# EAGLE board D_amplifier (EAGLE 9.6.2)
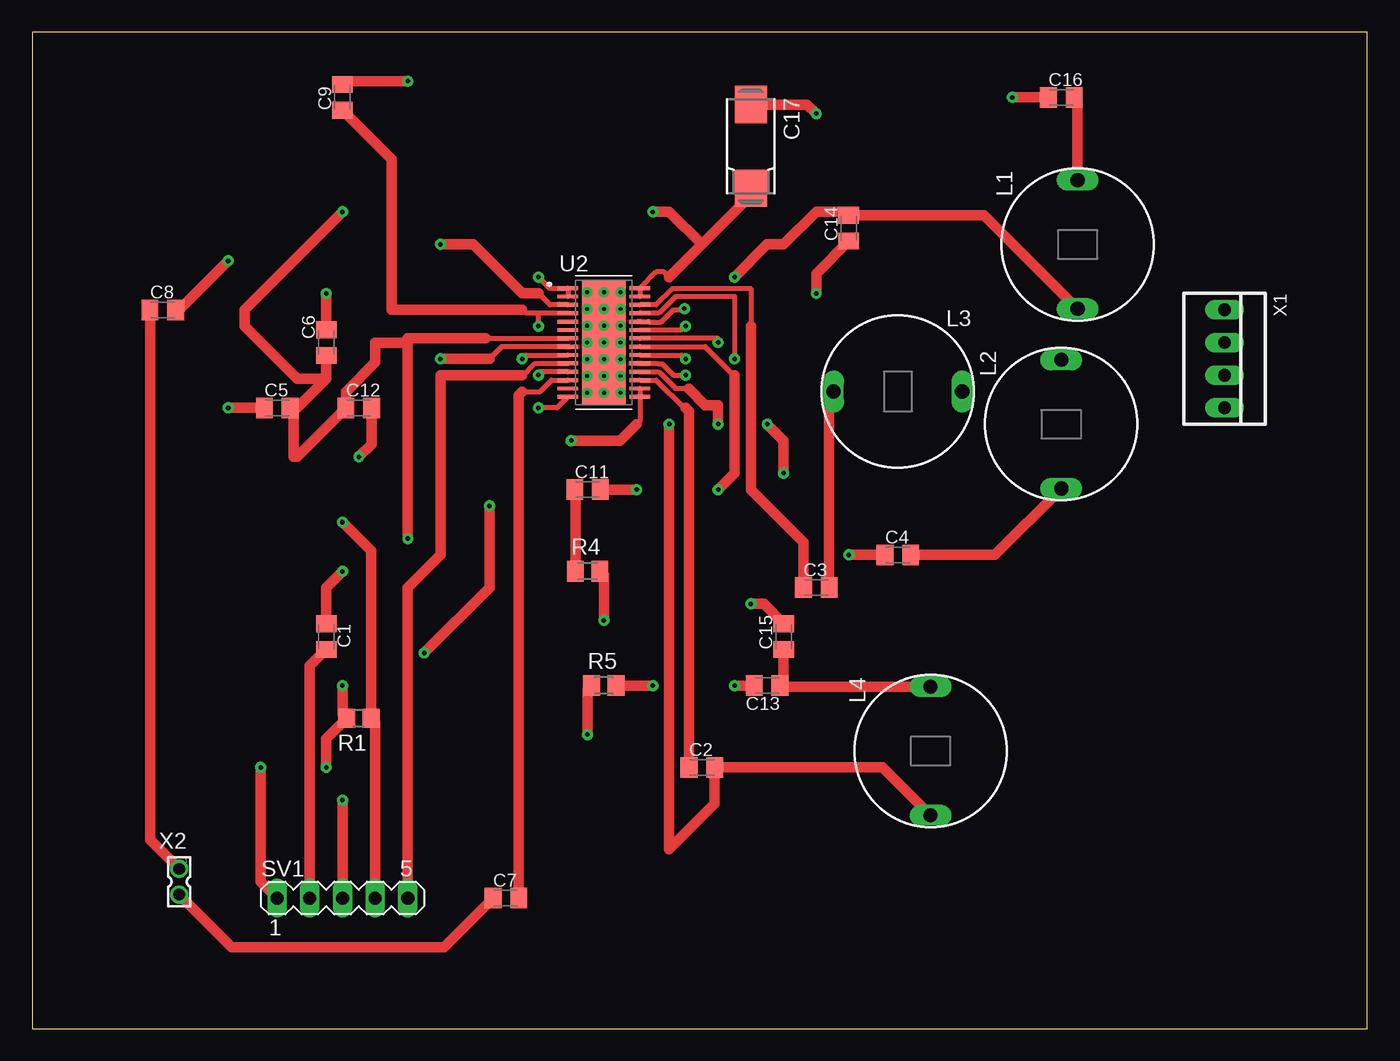
[diagram p0: board, top side]
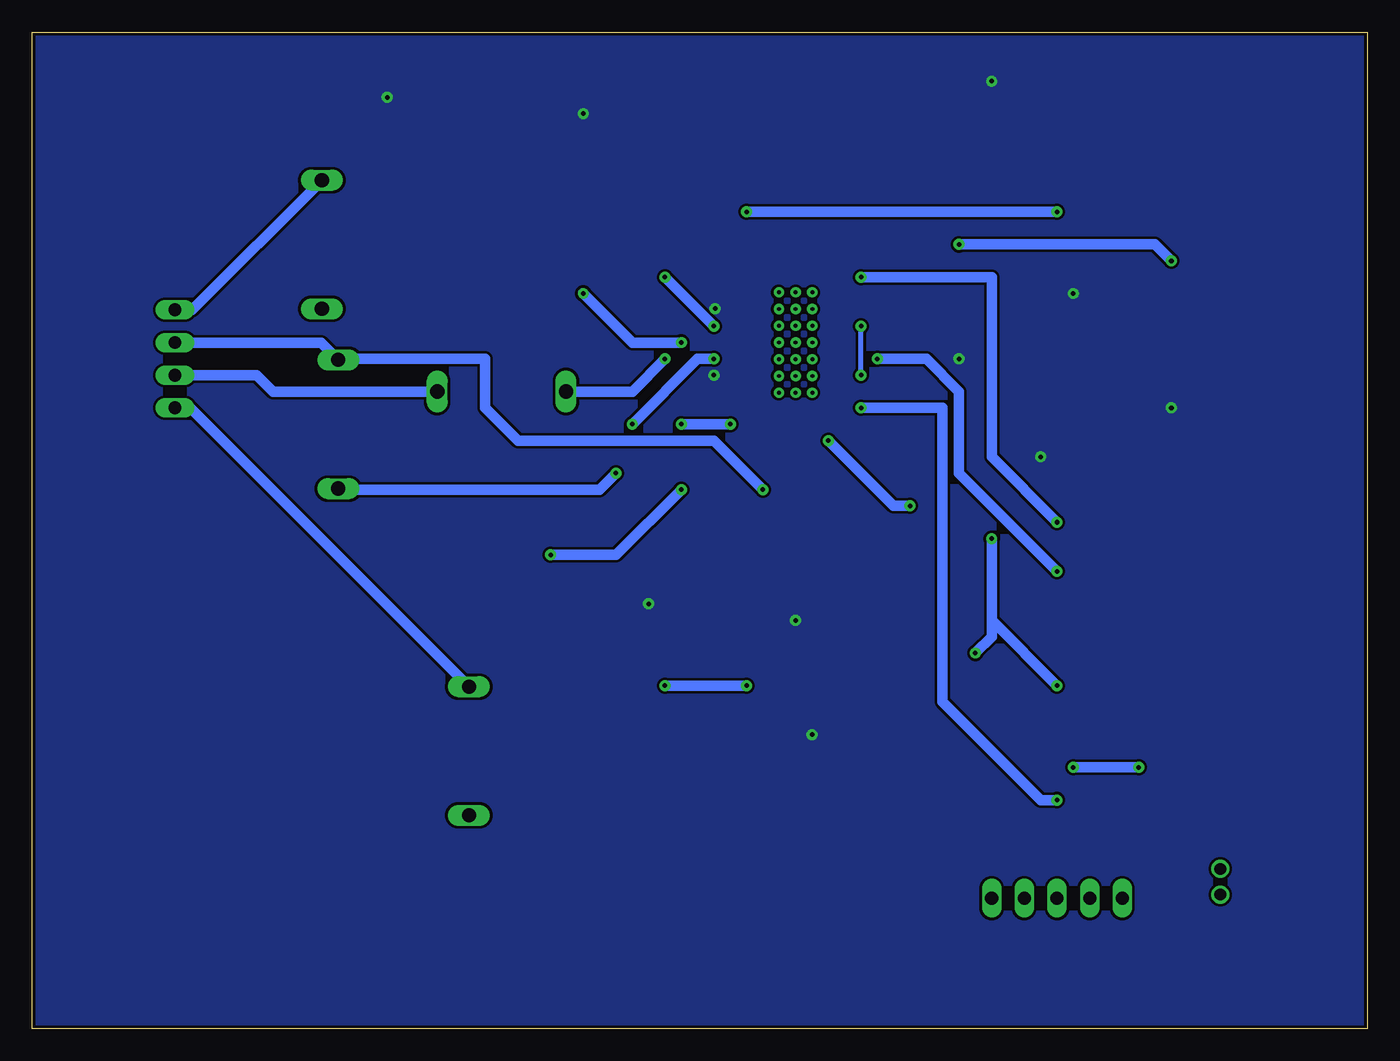
[diagram p1: board, bottom side, seen from below]

Size 103.81 x 77.46 mm. Coordinates in mm from the lower left corner, seen from the top.
Outline: 0,0 103.81,0 103.81,77.46 0,77.46 0,0
Copper layers (1*16): Top 0.018mm / dielectric 1.55mm / Bottom 0.018mm
Design rules "Eurocircuits_GT_panel": minimum track width 0.25mm, minimum drill 0.35mm, track to track 0.2mm, track to pad 0.2mm, pad to pad 0.2mm, via to via 0.2mm, smd to smd 0mil, copper to edge 0.25mm, drill to drill 0.35mm, minimum pad ring 0.25mm, minimum via ring 0.25mm, stop-mask expansion 0mil, vias tented up to drill 0.45mm, thermal gap 0.2mm

## Footprints (pad centres in the part's own frame; a part is rotated, then mirrored left to right if it is on the bottom)
C0805K = smd 1.3 x 1.6: 1 -1,0; 2 1,0
085CS_1AR = smd 2.9 x 2.5: + 3.25,0; - -3.25,0
SD12-680 = drill 1.1 long: 1 -5,0; 2 5,0
R0805 = smd 1.3 x 1.5: 1 -0.95,0; 2 0.95,0
M0805 = smd 1.3 x 1.6: 1 -0.95,0; 2 0.95,0
MA05-1 = drill 1.016 long: 1 -5.08,0; 2 -2.54,0; 3 0,0; 4 2.54,0; 5 5.08,0
IC_TPS61196PWPRQ1 = smd 1.6 x 0.3: 1 -2.8,4.225; 2 -2.8,3.575; 3 -2.8,2.925; 4 -2.8,2.275; 5 -2.8,1.625; 6 -2.8,0.975; 7 -2.8,0.325; 8 -2.8,-0.325; 9 -2.8,-0.975; 10 -2.8,-1.625; 11 -2.8,-2.275; 12 -2.8,-2.925; 13 -2.8,-3.575; 14 -2.8,-4.225; 15 2.8,-4.225; 16 2.8,-3.575; 17 2.8,-2.925; 18 2.8,-2.275; 19 2.8,-1.625; 20 2.8,-0.975; 21 2.8,-0.325; 22 2.8,0.325; 23 2.8,0.975; 24 2.8,1.625; 25 2.8,2.275; 26 2.8,2.925; 27 2.8,3.575; 28 2.8,4.225 | smd 3.4 x 9.7: 29 0,0 | drill 0.3 pad 0.5: 30 0,0; 31 0,1.3; 32 0,2.6; 33 0,3.9; 34 0,-1.3; 35 0,-2.6; 36 0,-3.9; 37 -1.3,3.9; 38 1.3,3.9; 39 -1.3,2.6; 40 1.3,2.6; 41 1.3,1.3; 42 -1.3,1.3; 43 -1.3,0; 44 1.3,0; 45 -1.3,-1.3; 46 1.3,-1.3; 47 -1.3,-2.6; 48 1.3,-2.6; 49 -1.3,-3.9; 50 1.3,-3.9
22-23-2041 = drill 1 long: 1 -3.81,0; 2 -1.27,0; 3 1.27,0; 4 3.81,0
332-02 = drill 0.9 pad 1.27: 1 0,-1; 2 0,1

## Placement (x,y rotation side)
C1  1µF  [C0805K]  22.86,30.48 270 top
C2  22µF  [C0805K]  52.07,20.32 0 top
C3  22µF  [C0805K]  60.96,34.29 0 top
C4  22µF  [C0805K]  67.31,36.83 0 top
C5  1µF  [C0805K]  19.05,48.26 0 top
C6  1µF  [C0805K]  22.86,53.34 90 top
C7  1µF  [C0805K]  36.83,10.16 0 top
C8  1µF  [C0805K]  10.16,55.88 0 top
C9  2µF  [C0805K]  24.13,72.39 90 top
C11  1nF  [C0805K]  43.18,41.91 0 top
C12  100pF  [C0805K]  25.4,48.26 0 top
C13  1nF  [C0805K]  57.15,26.67 180 top
C14  22µF  [C0805K]  63.5,62.23 90 top
C15  1nF  [C0805K]  58.42,30.48 90 top
C16  1nF  [C0805K]  80.01,72.39 0 top
C17  100µ  [085CS_1AR]  55.88,68.58 270 top
L1  33µH  [SD12-680]  81.28,60.96 90 top
L2  33µH  [SD12-680]  80.01,46.99 90 top
L3  33µH  [SD12-680]  67.31,49.53 0 top
L4  33µH  [SD12-680]  69.85,21.59 90 top
R1  [R0805]  25.4,24.13 180 top
R4  68  [M0805]  43.18,35.56 0 top
R5  68  [M0805]  44.45,26.67 0 top
SV1  [MA05-1]  24.13,10.16 0 top
U2  TPA3136D2PWPR  [IC_TPS61196PWPRQ1]  44.45,53.34 0 top
X1  22-23-2041  [22-23-2041]  92.71,52.07 270 top
X2  332-02  [332-02]  11.43,11.43 180 top

## Library data of the parts
C1-C9 C11-C17 = rcl; SPICEPREFIX: C
L1-L4 = inductor-neosid; MF: BUSSMANN; MPN: SD12-680; OC_FARNELL: unknown; OC_NEWARK: 19K7201
R1 R4 R5 = rcl; SPICEPREFIX: R
SV1 = con-lstb; OC_FARNELL: unknown; OC_NEWARK: unknown
U2 = TPA3136D2PWPR; AVAILABILITY: Warning; DESCRIPTION: 10-W stereo, 20-W mono, 4.5- to 14.4-V, analog in Class-D audio amplifier w/ inductor free & low EMI 28-HTSSOP -40 to 85; MF: Texas Instruments; MP: TPA3136D2PWPR; PACKAGE: HTSSOP-28 Texas Instruments; PRICE: None; PURCHASE-URL: https://pricing.snapeda.com/search/part/TPA3136D2PWPR/?ref=eda
X1 = con-molex; MF: MOLEX; MPN: 22-23-2041; OC_FARNELL: 1462920; OC_NEWARK: 38C0355
X2 = con-garry

## Nets
+5V: C1.2 SV1.2
+12V: C5.2 C6.1 C12.1 C17.+ R1.2 SV1.1 U2.7 U2.15 U2.16 U2.27 U2.28
GND: C5.1 C6.2 C9.2 C12.2 C15.2 C16.1 C17.- R4.2 R5.1 U2.8 U2.19 U2.24
N$1: C7.2 U2.12
N$2: C8.2 U2.3
N$3: SV1.5 U2.10
N$4: C14.2 L1.1 U2.23
N$5: C4.2 L2.1 U2.20
N$6: C3.2 L3.1 U2.25
N$7: C2.2 L4.1 U2.18
N$8: R1.1 SV1.4 U2.1 U2.2
N$9: SV1.3 U2.14
N$10: C4.1 U2.21
N$11: C3.1 U2.26
N$12: C2.1 U2.17
N$13: C14.1 U2.22
N$14: C1.1 U2.9
N$15: C7.1 X2.2
N$16: C8.1 X2.1
N$17: C9.1 U2.4 U2.11
N$18: C16.2 L1.2 X1.1
N$19: C11.2 L2.2 X1.2
N$20: L3.2 X1.3
N$21: C13.1 C15.1 L4.2 X1.4
N$22: C13.2 R5.2
N$23: C11.1 R4.1

## Tracks (layer width: path | path; a pad name or v marks a point on that pad's centre or on a via)
+5V
  Top 0.813: C1.2 21.59,28.21 SV1.2
+12V  (via drill 0.35)
  Top 0.406: U2.27 U2.28 48.52,58.84 49.12,58.84 49.53,58.42 | 35.23,53.66 U2.7 | U2.16 U2.15 47.25,47.25 46.99,46.99
  Top 0.813: 49.53,58.42 52.07,60.96 | 52.07,60.96 55.88,64.77 C17.+ | 20.32,47.99 20.32,44.45 20.59,44.45 C12.1 24.4,49.53 26.67,51.8 26.67,53.34 29.21,53.34 | 20.32,47.99 C5.2 | C6.1 22.86,50.53 | 22.86,50.53 20.32,47.99 | 35.23,53.66 29.21,53.66 29.21,53.34 | 22.86,50.53 20.59,50.53 16.51,54.61 16.51,55.88 v24.13,63.5 | v48.26,63.5 49.53,63.5 52.07,60.96 | 46.99,46.99 45.72,45.72 v41.91,45.72 | v35.56,40.64 35.56,34.29 v30.48,29.21 | v29.21,38.1 29.21,53.34 | SV1.1 17.78,11.43 v17.78,20.32 | v22.86,20.32 22.86,22.54 R1.2 24.13,24.45 v24.13,26.67
  Bottom 0.813: v24.13,63.5 v48.26,63.5 | v41.91,45.72 36.83,40.64 v35.56,40.64 | v30.48,29.21 29.21,30.48 29.21,31.75 | v29.21,38.1 29.21,36.83 29.21,31.75 | v17.78,20.32 v22.86,20.32 | 29.21,31.75 v24.13,26.67
GND  (via drill 0.35)
  Top 0.406: 35.56,52.07 36.51,53.02 U2.8 | U2.24 47.91,54.97 47.95,54.92 48.89,54.92 49.85,55.88 50.8,55.88 v50.71,55.97 | U2.19 48.62,51.72 48.66,51.67 48.98,51.67 49.85,50.8 v50.8,50.8
  Top 0.813: C9.2 24.4,73.66 v29.21,73.66 | C6.2 v22.86,57.15 | C5.1 v15.24,48.26 | C12.2 26.4,45.45 v25.4,44.45 | 35.56,52.07 v31.75,52.07 | C17.- 60.25,71.83 v60.96,71.12 | C16.1 v76.2,72.39 | R5.1 43.18,26.35 v43.18,22.86 | R4.2 44.45,35.24 v44.45,31.75 | C15.2 56.88,33.02 v55.88,33.02
  pour Bottom: 0,77.47 104.14,77.47 104.14,0 0,0
  pour Top: 40.64,58.42 40.64,48.26 48.26,48.26 48.26,58.42
  pour Bottom: 40.64,58.42 48.26,58.42 48.26,48.26 40.64,48.26
N$1
  Top 0.406: U2.12 40.38,50.41 39.49,49.53 38.1,49.53
  Top 0.813: C7.2 37.83,49.26 38.1,49.53
N$2  (via drill 0.35)
  Top 0.406: U2.3 40.26,56.27 39.37,57.15
  Top 0.813: 39.37,57.15 38.1,57.15 34.29,60.96 v31.75,60.96 | v15.24,59.69 11.43,55.88 C8.2
  Bottom 0.813: v31.75,60.96 16.51,60.96 v15.24,59.69
N$3
  Top 0.406: U2.10 39.11,51.72 38.2,50.8 38.1,50.8
  Top 0.813: SV1.5 29.21,34.29 31.75,36.83 31.75,50.8 38.1,50.8
N$4  (via drill 0.35)
  Top 0.406: U2.23 50.51,54.32 v50.8,54.61
  Top 0.813: L1.1 74.01,63.23 C14.2 63.23,63.5 60.96,63.5 58.42,60.96 57.15,60.96 v54.61,58.42
  Bottom 0.813: v54.61,58.42 v50.8,54.61
N$5  (via drill 0.35)
  Top 0.406: v50.8,52.07 50.51,52.37 U2.20
  Top 0.813: L2.1 74.85,36.83 C4.2 | v57.15,46.99 58.42,45.72 v58.42,43.18
  Bottom 0.813: v50.8,52.07 52.07,52.07 v57.15,46.99 | L2.1 79.93,41.91 59.69,41.91 v58.42,43.18
N$6  (via drill 0.35)
  Top 0.406: U2.25 47.29,55.66 48.77,55.66 50.04,56.93 54.61,56.93 v54.61,52.07
  Top 0.813: L3.1 61.96,48.28 C3.2
  Bottom 0.813: L3.1 57.15,49.53 v54.61,52.07
N$7  (via drill 0.35)
  Top 0.406: U2.18 48.73,51.07 50.04,49.75 51.05,49.75
  Top 0.813: v49.53,46.99 49.53,13.97 53.07,17.51 C2.2 66.12,20.32 L4.1 | v53.34,46.99 53.34,48.48 52.32,48.48 51.05,49.75
  Bottom 0.813: v49.53,46.99 v53.34,46.99
N$8  (via drill 0.35)
  Top 0.406: v39.37,58.42 40.23,57.57 U2.1 U2.2
  Top 0.813: SV1.4 26.67,23.81 R1.1 26.35,37.15 v24.13,39.37
  Bottom 0.813: v39.37,58.42 29.21,58.42 29.21,44.45 v24.13,39.37
N$9  (via drill 0.35)
  Top 0.406: v39.37,48.26 40.8,48.26 U2.14
  Top 0.813: SV1.3 v24.13,17.78
  Bottom 0.813: v24.13,17.78 25.4,17.78 33.02,25.4 33.02,48.26 v39.37,48.26
N$10  (via drill 0.35)
  Top 0.406: 54.61,50.8 54.55,50.8 52.33,53.02 U2.21
  Top 0.813: C4.1 v63.5,36.83 | 54.61,50.8 54.61,43.18 v53.34,41.91
  Bottom 0.813: v63.5,36.83 58.42,36.83 v53.34,41.91
N$11
  Top 0.406: 55.88,54.61 55.88,57.54 49.79,57.54 48.52,56.27 U2.26
  Top 0.813: C3.1 59.96,37.83 55.88,41.91 55.88,54.61
N$12
  Top 0.406: U2.17 48.52,50.41 50.8,48.14 50.8,48.26
  Top 0.813: 50.8,48.26 51.07,47.99 C2.1
N$13  (via drill 0.35)
  Top 0.406: v53.34,53.34 53.34,53.66 U2.22
  Top 0.813: C14.1 60.96,58.69 v60.96,57.15
  Bottom 0.813: v60.96,57.15 57.15,53.34 v53.34,53.34
N$14  (via drill 0.35)
  Top 0.406: v38.1,52.07 38.4,52.37 U2.9
  Top 0.813: C1.1 22.86,34.29 v24.13,35.56
  Bottom 0.813: v24.13,35.56 31.75,43.18 31.75,49.53 34.29,52.07 v38.1,52.07
N$15
  Top 0.813: X2.2 15.51,6.35 32.02,6.35 C7.1
N$16
  Top 0.813: X2.1 9.16,14.7 C8.1
N$17  (via drill 0.35)
  Top 0.406: U2.4 39.37,55.62 | 39.37,55.62 38.37,55.62 38.1,55.88 | v39.37,54.61 39.37,55.62 | U2.11 39.37,51.07 v39.37,50.8
  Top 0.813: 38.1,55.88 27.94,55.88 27.94,67.58 C9.1
  Bottom 0.406: v39.37,50.8 v39.37,54.61
N$18
  Top 0.813: C16.2 81.28,72.12 L1.2
  Bottom 0.813: L1.2 91.36,55.88 X1.1
N$19  (via drill 0.35)
  Top 0.813: C11.2 v46.99,41.91
  Bottom 0.813: X1.2 81.36,53.34 L2.2 79.93,52.07 68.58,52.07 68.58,48.26 66.04,45.72 50.8,45.72 v46.99,41.91
N$20
  Bottom 0.813: X1.3 86.36,50.8 85.09,49.53 L3.2
N$21
  Top 0.813: L4.2 58.23,26.59 C13.1 58.42,26.94 C15.1
  Bottom 0.813: L4.2 91.52,48.26 X1.4
N$22  (via drill 0.35)
  Top 0.813: C13.2 v54.61,26.67 | v48.26,26.67 R5.2
  Bottom 0.813: v54.61,26.67 v48.26,26.67
N$23
  Top 0.813: R4.1 42.23,41.86 C11.1